# Altium PCB HCHO_Benchmark.PcbDoc
Units mm, origin at the board's own origin, x right, y up, seen from the top; angles counter-clockwise.
Board outline 75.3 x 69.27 mm, 2 copper layers (Top Layer, Bottom Layer); 48 components, 50 nets, 181 pads, 117 vias.
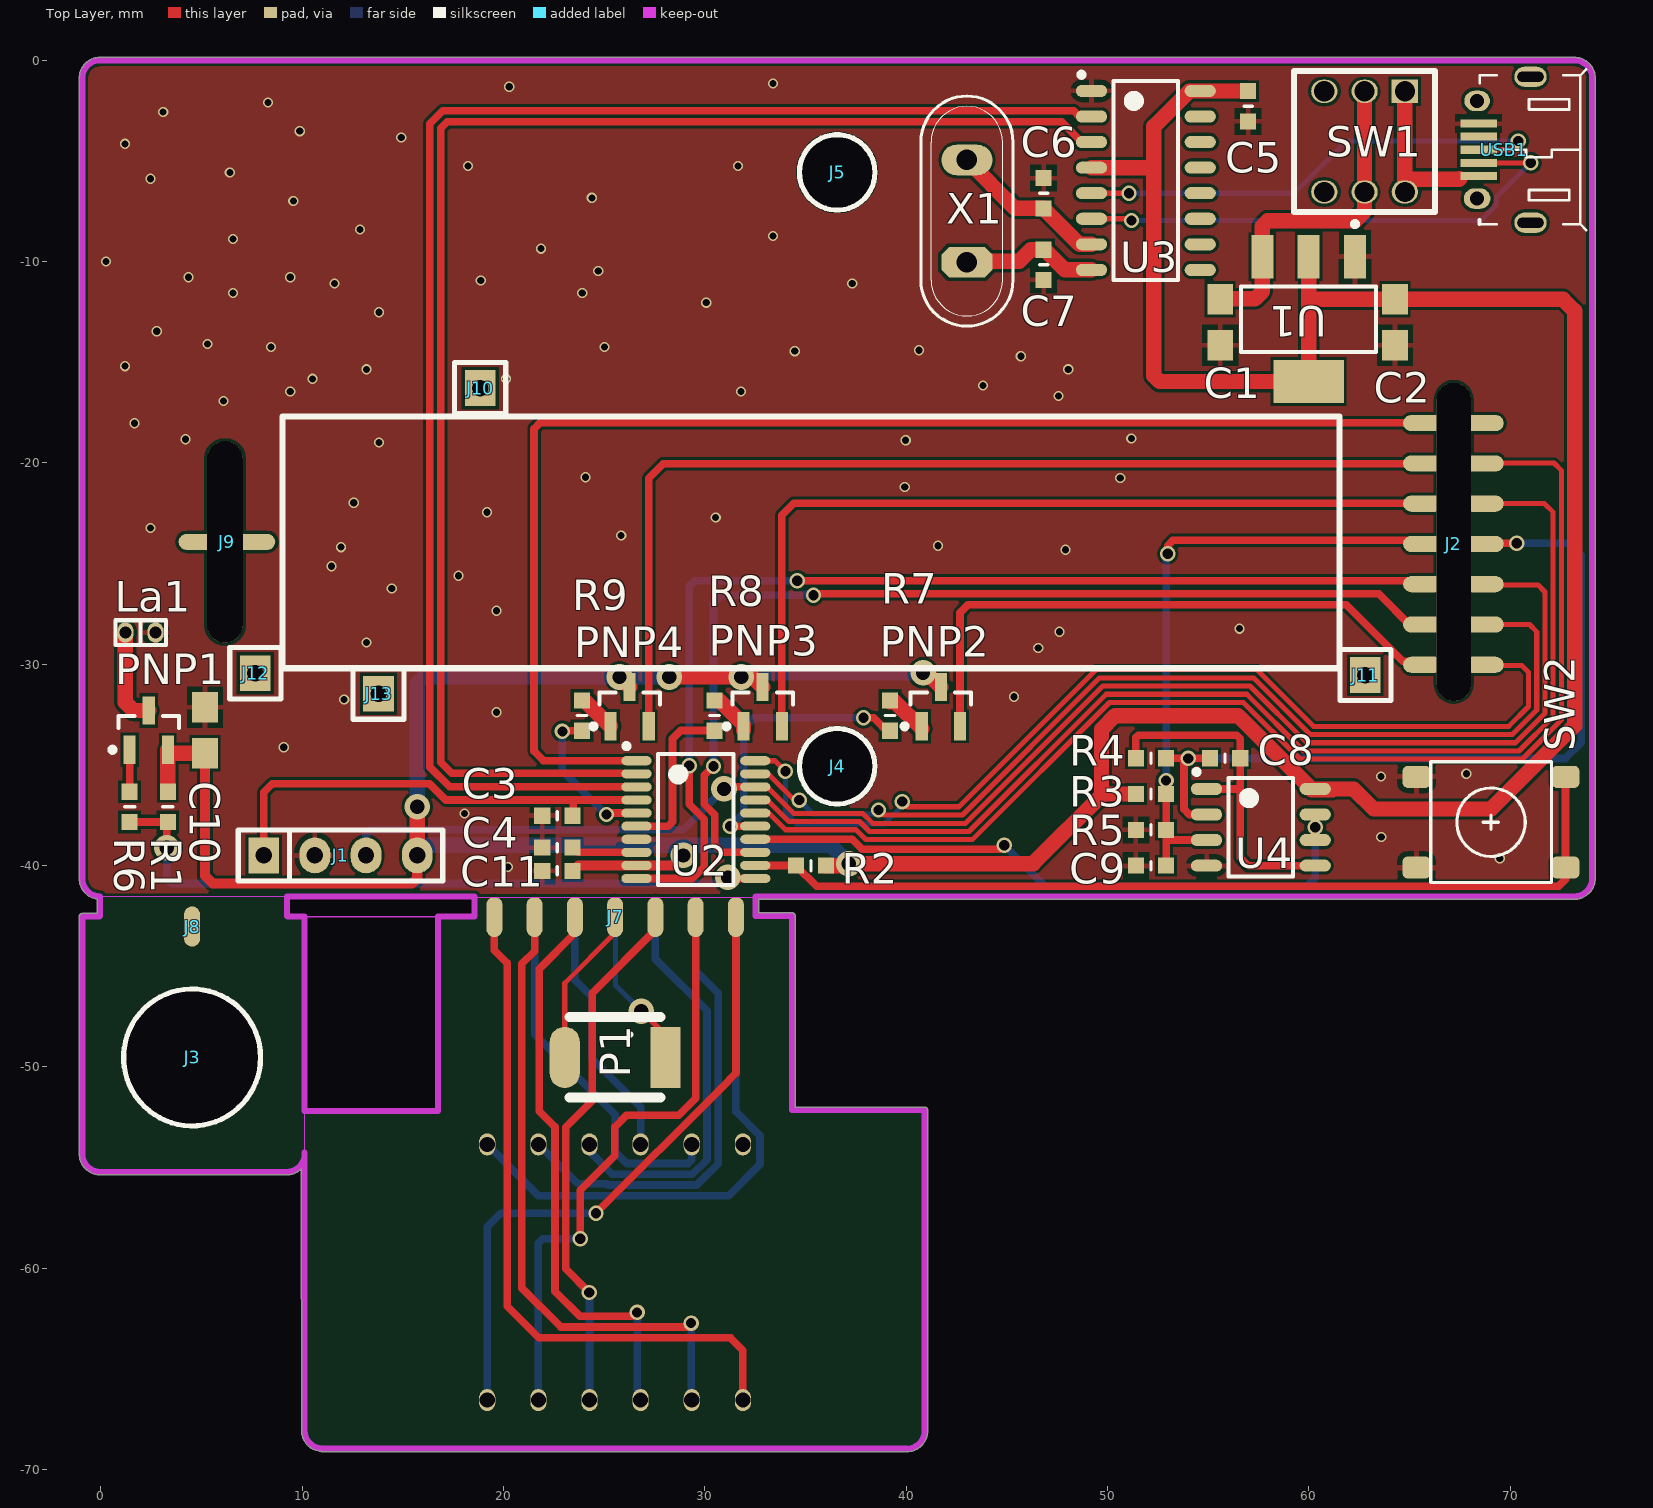
[diagram p0: Top Layer view]
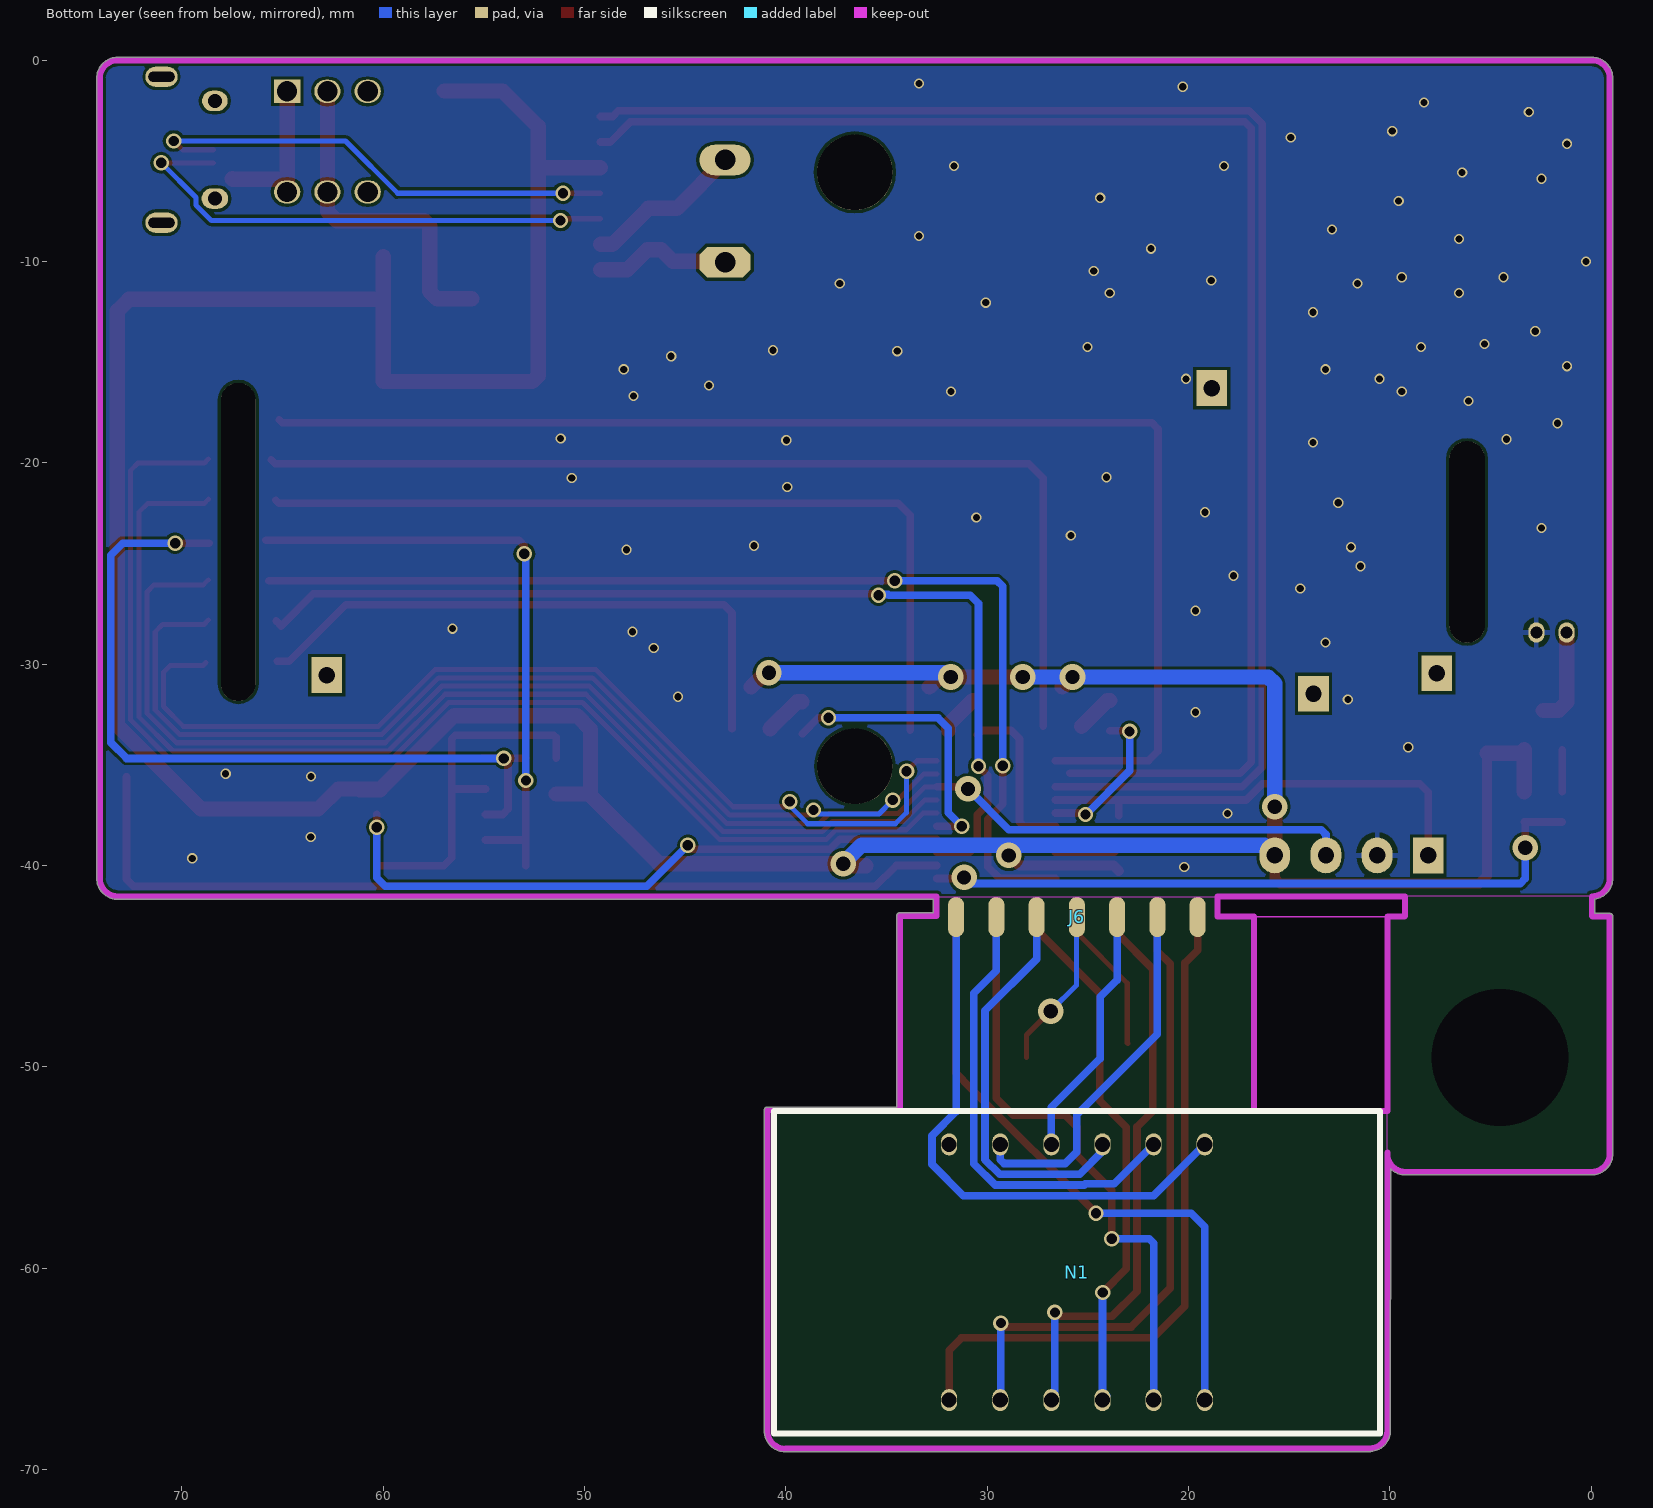
[diagram p1: Bottom Layer view, seen from below]

## Layer stack, top to bottom
Top Layer: signal copper 0.0356
Dielectric: dielectric 0.32, FR-4, Dk 4.8
Bottom Layer: signal copper 0.0356

## Board outline
-1.08,-54.322 -1.08,-42.532 cw(c-0.929,-42.532) -1.036,-42.425 cw(c-0.929,-42.531) -0.929,-42.381 -0.191,-42.381 -0.191,-41.668 cw(c-0.04,-40.64) -1.08,-40.64 -1.08,-0.929 cw(c-0.929,-0.929) -1.078,-0.909 cw(c-0.929,-0.889) -1.08,-0.889 cw(c-0.04,-0.889) -0.04,0.15 cw(c-0.04,0) -0.02,0.149 cw(c0,0) 0,0.15 73.182,0.15 cw(c73.182,-0.889) 74.221,-0.889 cw(c74.071,-0.889) 74.221,-0.89 74.221,-40.64 cw(c73.182,-40.64) 73.182,-41.679 32.671,-41.679 32.671,-42.343 34.337,-42.343 cw(c34.337,-42.494) 34.488,-42.494 34.488,-51.995 40.914,-51.995 cw(c40.914,-52.145) 41.064,-52.145 41.064,-68.16 cw(c40.914,-68.16) 41.054,-68.213 cw(c40.023,-68.081) 40.023,-69.12 cw(c40.023,-68.97) 39.982,-69.115 11.001,-69.115 cw(c11.001,-68.964) 10.94,-69.102 cw(c11.001,-68.064) 9.961,-68.064 9.958,-55.063 cw(c9.228,-54.323) 9.228,-55.362 cw(c9.228,-55.212) 9.211,-55.361 -0.04,-55.361 cw(c-0.04,-54.322)
cut-out: 18.551,-41.529 18.551,-42.532 9.23,-42.532 9.23,-41.529 9.231,-41.529
cut-out: 16.736,-42.531 16.736,-52.235 10.119,-52.235 10.119,-42.532 10.119,-42.531

## Design rules (kind name [scope] priority, off if disabled: settings)
Clearance "6mil Special" [(HasFootprint('FPC 0.5mm 4P') OR HasFootprint('FPC 0.5mm 16P') OR HasFootprint('QFN40P500X500X90_HS-41L'))] p1: gap=0.152
Clearance "8mil all" [All] p2: gap=0.152
ComponentClearance [All] p1: gap=-100 collisioncheckmode=3 verticalgap=0.254 showdistances=FALSE
Height [All] p1: minheight=0 maxheight=50.8 prefheight=12.7
HoleSize [All] p1: absolutevalues=TRUE maxlimit=1817.048 minlimit=0 maxpercent=80.000 minpercent=20.000
HoleToHoleClearance [All] p1: gap=0.203 allowstackedmicrovias=TRUE
MinimumSolderMaskSliver [All] p1: minsoldermaskwidth=0
PolygonConnect PolygonConnect_1 [isvia] p1: connectstyle=Direct reliefconductorwidth=0.254 reliefentries=4 polygonreliefangle="90 Angle" airgapwidth=0.254
PolygonConnect [All] p2: connectstyle=Relief reliefconductorwidth=0.254 reliefentries=4 polygonreliefangle="90 Angle" airgapwidth=0.254
RoutingCorners [All] p1: cornerstyle=45-Degree minsetback=0.254 maxsetback=2.54
RoutingVias [All] p1: holewidth=0.356 width=0.508 viastyle="Through Hole" minholewidth=0.356 minwidth=0.508 maxholewidth=2.54 maxwidth=5.08
SilkToSilkClearance [All] p1: silktosilkclearance=0
SilkToSolderMaskClearance [IsPad] p1: minsilkscreentomaskgap=0 clearancetoexposedcopper=TRUE
SolderMaskExpansion [All] p1: expansion=0.102
Width 20mil_Power [(InNet('EP_SUPPLY&VBAT') OR InNet('PSUPPLY') OR InNet('P_3.3V') OR InNet('PSUPPLYBAT') OR InNet('P_3.3V') OR InNet('P_5V'))] p1: maxlimit=1000 minlimit=0.203 preferedwidth=0.508
Width 8mil_Basic [All] p2: maxlimit=100 minlimit=0.203 preferedwidth=0.254
20 further rules are at their usual default settings.

## Classes and differential pairs
component class HCHO_Benchmark: C1 C2 C3 C4 C5 C7 C8 C9 C10 J1 J2 J4 J5 J6 J7 J8 J9 J10 J11 J12 J13 La1 N1 P1 PNP1 PNP2 PNP3 PNP4 R1 R2 R3 R4 R5 R6 R7 R8 R9 SW1 SW2 U1 U2 U3 U4 USB1 X1

## Components (designator, comment, footprint, x,y, rotation, side; value= is the part's Value field where it differs from the comment)
C1 "10uf" C0805 55.591,-13.019 r270 top
C2 "10uf" C0805 64.278,-13.019 r270 top
C3 "1uf" C0603 22.667,-37.526 r0 top
C4 "1uf" C0603 22.667,-39.11 r0 top
C5 "1uf" C0603 56.983,-2.286 r270 top
C6 "12pf" C0603 46.823,-6.604 r90 top
C7 "12pf" C0603 46.823,-10.16 r270 top
C8 "1uf" C0603 55.84,-34.671 r180 top
C9 "10uf" C0603 52.157,-40.005 r180 top
C10 "10uf" C0805 5.167,-33.274 r90 top
C11 "Comment" C0603 22.667,-40.268 r180 top
J1 "CON4" CON4 11.898,-39.497 r0 top
J2 "Con7x2_PCB" CON7X2_PCB 67.182,-23.927 r90 top
J3 "CON1" 6.6mm 4.525,-49.532 r0 top
J4 "CON1" 3.75mm 36.571,-35.07 r0 top
J5 "CON1" 3.75mm 36.571,-5.57 r0 top
J6 "CON7_PCB" CON7_PCB 25.54,-42.555 r0 bottom
J7 "CON7_PCB" CON7_PCB 25.539,-42.552 r180 top
J8 "CON1_PCB" CON1_PCB 4.128,-43.032 r0 top
J9 "CON1X2_PCB" CON1X2_PCB 6.159,-23.927 r90 top
J10 "CON1" CON1 18.838,-16.286 r0 top
J11 "CON1" CON1 62.807,-30.541 r0 top
J12 "CON1" CON1 7.666,-30.448 r0 top
J13 "CON1" CON1 13.788,-31.465 r0 top
La1 "Laser" Battry_Connector 1.212,-28.426 r0 top (schematic designator Laser1)
N1 "FJ4301BH" FJ4301BH 25.536,-60.201 r0 bottom
P1 "photodetector" BPW34 25.536,-49.532 r180 top
PNP1 "8550" SOT23-3 2.373,-33.274 r90 top
PNP2 "8550" SOT23-3 41.72,-32.109 r90 top
PNP3 "8550" SOT23-3 32.869,-32.109 r90 top
PNP4 "8550" SOT23-3 26.258,-32.109 r90 top
R1 "10K" R0603 3.323,-37.084 r90 top
R2 "10K" R0603 35.266,-40.005 r0 top
R3 "4K7" R0603 52.157,-36.449 r180 top
R4 "10M" R0603 52.157,-34.671 r180 top
R5 "1K" R0603 52.157,-38.227 r0 top
R6 "1K" R0603 1.423,-37.084 r270 top
R7 "1K" R0603 39.196,-32.553 r270 top
R8 "1K" R0603 30.478,-32.553 r270 top
R9 "1K" R0603 23.892,-32.553 r270 top
SW1 "SW_7x7mm" SW_7x7mm 62.765,-4.041 r180 top
SW2 "Patch_6x6x5" PATCH6X6X5 69.048,-37.846 r180 top
U1 "1117-3.3" SOT223 59.988,-12.86 r180 top
U2 "STM8S003F3P6" STM8S003F3P6 29.551,-37.719 r0 top
U3 "CH340G" SOP-16 51.903,-5.969 r0 top
U4 "LMV358" LMV358_SOP 57.618,-38.1 r0 top
USB1 "MicroUSB" MicroUSB 69.683,-4.445 r180 top
X1 "12MHZ" HC-49 43.013,-7.493 r90 top

## Footprints (in the part's own frame and the unit in brackets; to place one, negate y for a bottom-side part, rotate by r counter-clockwise, add the part's x,y. Pads: shape width x height; smd on the part's side, far side on the other; paste and mask are expansions set on the pad)
3.75mm [mm]
  round 3.75 hole 3.75 unplated: ""(0,0)
6.6mm [mm]
  round 6.6 hole 6.8 unplated: ""(0,0)
Battry_Connector [mm]
  oval 0.8x1 hole 0.6: 1(0,0) 2(1.5,0)
  silkscreen extent -0.5,-0.61 2.02,0.61
BPW34 [mm]
  rect 1.5x3.048 smd: A(-2.5,0)
  oval 1.5x3.048 smd: C(2.5,0)
  silkscreen extent -2.25,-2 2.25,2
C0603 [mm]
  rect 0.8x0.8 smd: 1(-0.75,0) 2(0.75,0)
  silkscreen extent 0,-0.2 0,0.2, body extent -0.8,-0.4 0.8,0.4, height 0.8
C0805 [mil]
  rect 60x50 smd: 1(-45,0) 2(45,0)
  body extent -52,-25 55,25, height 31
CON1 [mil]
  rect 60x70 hole 32: 1(0,0)
  silkscreen extent -50,-50 50,50, body extent -51,-50 52,50, height 295
CON1_PCB [mm]
  oval 0.8x2 smd: 1(0.397,0)
CON1X2_PCB [mm]
  oval 10x1.75 hole 1.75 slot 10 at 0 deg unplated: 0(0,0)
  oval 0.8x2 smd: 1(0,1.3) 2(0,-1.5)
CON4 [mil]
  rect 60x70 hole 32: 1(-150,0)
  oval 60x70 hole 32: 2(-50,0) 3(50,0) 4(150,0)
  silkscreen extent -200,-50 200,50, body extent -201,-50 199,50, height 295
CON7_PCB [mm]
  oval 0.8x2 smd: 1(-6,0) 2(-4,0) 3(-2,0) 4(0,0) 5(2,0) 6(4,0) 7(6,0)
CON7X2_PCB [mm]
  oval 0.8x2 smd: 1(-6.1,1.5) 2(-4.1,1.5) 3(-2.1,1.5) 4(-0.1,1.5) 5(1.9,1.5) 6(3.9,1.5) 7(5.9,1.5) 8(5.9,-1.5) 9(3.9,-1.5) 10(1.9,-1.5) 11(-0.1,-1.5) 12(-2.1,-1.5) 13(-4.1,-1.5) 14(-6.1,-1.5)
  oval 15.8x1.7 hole 1.7 slot 15.8 at 0 deg unplated: ""(0.003,-0.012)
FJ4301BH [mm]
  oval 0.8x1.1 hole 0.75: 1(-6.35,-6.35) 2(-3.81,-6.35) 3(-1.27,-6.35) 4(1.27,-6.35) 5(3.81,-6.35) 6(6.35,-6.35) 7(6.35,6.35) 8(3.81,6.35) 9(1.27,6.35) 10(-1.27,6.35) 11(-3.81,6.35) 12(-6.35,6.35)
  silkscreen extent -15.05,-8 15.05,8, body extent -15.05,-8 15.05,8, height 15.1
HC-49 [mil]
  oct 60x100 hole 40: 1(-100,0)
  oval 60x100 hole 40: 2(100,0)
  silkscreen extent -225,-90 225,90, body extent -224,-91 226,89, height 134
LMV358_SOP [mm] "TSOP, 8-Leads, Body 3.00x3.00mm, Pitch 0.65mm, IPC Medium Density"
  oval 1.55x0.6 smd: 1(-2.7,1.905) 2(-2.7,0.635) 3(-2.7,-0.635) 4(-2.7,-1.905) 5(2.7,-1.905) 6(2.7,-0.635) 7(2.7,0.635) 8(2.7,1.905)
  silkscreen extent -3.32,-2.45 1.6,2.87, body extent -1.95,-2.47 1.93,2.46, height 1.1
MicroUSB [mm]
  oval 1.6x1 hole 0.5 slot 1.3 at 0 deg unplated: 0(-1.325,3.625) 0(-1.325,-3.625)
  rect 1.8x0.4 smd: 1(1.25,1.3) 2(1.25,0.65) 3(1.25,0) 4(1.25,-0.65) 5(1.25,-1.3)
  oval 1.321x1.016 hole 0.7 unplated: ""(1.325,2.425)
  oval 1.27x1.016 hole 0.7 unplated: ""(1.325,-2.425)
  silkscreen extent -4.1,-4 1.2,4, body extent -3.62,-3.96 1.81,4.02, height 2.99
PATCH6X6X5 [mm]
  rrect50% 1.4x1.1 smd: 1(-3.7,2.25) 2(-3.7,-2.25) 3(3.7,-2.25) 4(3.7,2.25)
  silkscreen extent -3,-3 3,3, body extent -4.13,-3 4.13,3, height 5
R0603 [mm]
  rect 0.8x0.8 smd: 1(-0.75,0) 2(0.75,0)
  silkscreen extent 0,-0.25 0,0.25, body extent -0.8,-0.4 0.8,0.4, height 0.5
SOP-16 [mm]
  oval 1.55x0.6 smd: 1(-2.7,4.445) 2(-2.7,3.175) 3(-2.7,1.905) 4(-2.7,0.635) 5(-2.7,-0.635) 6(-2.7,-1.905) 7(-2.7,-3.175) 8(-2.7,-4.445) 9(2.7,-4.445) 10(2.7,-3.175) 11(2.7,-1.905) 12(2.7,-0.635) 13(2.7,0.635) 14(2.7,1.905) 15(2.7,3.175) 16(2.7,4.445)
  silkscreen extent -3.32,-4.95 1.6,5.37, body extent -1.91,-4.95 1.91,4.95, height 1
SOT23-3 [mm]
  rect 1.4x0.6 smd: 1(-0.975,0.95) 2(-0.975,-0.95) 3(0.975,0)
  silkscreen extent -1.1,-1.5 0.7,1.92, body extent -0.7,-1.5 0.7,1.5, height 1
SOT223 [mm]
  rect 1.1x2.15 smd: 1(-2.3,-3.1) 2(0,-3.1) 3(2.3,-3.1)
  rect 3.5x2.15 smd: 4(0,3.1)
  silkscreen extent -3.35,-4.85 3.35,1.63, body extent -3.3,-3.2 3.3,3.1, height 1.7
STM8S003F3P6 [mm]
  oval 1.5x0.45 smd: 1(-2.95,2.925) 2(-2.95,2.275) 3(-2.95,1.625) 4(-2.95,0.975) 5(-2.95,0.325) 6(-2.95,-0.325) 7(-2.95,-0.975) 8(-2.95,-1.625) 9(-2.95,-2.275) 10(-2.95,-2.925) 11(2.95,-2.925) 12(2.95,-2.275) 13(2.95,-1.625) 14(2.95,-0.975) 15(2.95,-0.325) 16(2.95,0.325) 17(2.95,0.975) 18(2.95,1.625) 19(2.95,2.275) 20(2.95,2.925)
  silkscreen extent -3.57,-3.25 1.88,3.77, body extent -2.22,-3.25 2.2,3.24, height 1.2
SW_7x7mm [mm]
  rect 1.3x1.15 hole 1: 1(-2,-2.5)
  oval 1.3x1.15 hole 1: 2(0,-2.5) 3(2,-2.5) 4(2,2.5) 5(0,2.5) 6(-2,2.5)
  silkscreen extent -3.5,-3.5 3.5,3.5, body extent -3.54,-3.49 3.51,3.52, height 12.5

## Part data
C1 C2 C3 C4 C5 C6 C7 C8 C9 C10: library part C
PNP1 PNP2 PNP3 PNP4: library part PNP
R1 R2 R3 R4 R5 R6 R7 R8 R9: library part R
U1: library part 1117
X1: library part CRYSTAL

## Via types
v1: diameter 0.508, hole 0.356, Top Layer to Bottom Layer, 79 vias
v2: diameter 0.762, hole 0.508, Top Layer to Bottom Layer, 27 vias
v3: diameter 1.27, hole 0.711, Top Layer to Bottom Layer, 11 vias

## Nets (pads, with @x,y where several pads share a name; then routed paths per layer and width w, separated by ;. In a path a pad name is that pad's centre, name@x,y a point inside that pad or via, vN(x,y) a via of type N, cw(c..) or ccw(c..) an arc to the next point about the centre after c; other vN are vias at no path point)
-INA: C8.2 J2.11 R4.1 U4.2 | length 40.4
  Top Layer w0.381: R4.1 v2@53.808,-34.671 ; v2(54.003,-34.679) v2@53.8,-34.679 ; U4.2 54.062,-37.465 53.8,-37.203 v2@53.8,-34.679 ; C8.2 v2@53.808,-34.671 ; J2.11@68.652,-23.988 v2(70.329,-23.988) ; v2@53.8,-34.679 v2@53.808,-34.671
  Bottom Layer w0.381: v2(54.003,-34.679) 72.743,-34.679 73.534,-33.888 73.534,-24.585 72.937,-23.988 v2(70.329,-23.988)
C_LASER: R1.1 R6.2 U2.11 | length 34.2
  Top Layer w0.381: R6.2 R1.1 3.262,-37.895 v3(3.262,-39.116) ; v3(31.141,-40.592) 31.194,-40.644 U2.11
  Bottom Layer w0.381: v3(3.262,-39.116) 3.262,-40.64 3.516,-40.894 30.839,-40.894 v3(31.141,-40.592)
GND: C1.2 C2.2 C3.1 C4.1 C5.2 C6.2 C7.2 C9.2 C10.2 C11.2 J1.2 La1.2 R5.1 SW2.3 SW2.4 U1.1 U2.7 U3.1 U4.4 USB1.5
  other v1: 20.204,-40.079 69.476,-39.642 63.596,-38.587 18.064,-37.415 63.586,-35.572 67.82,-35.443 9.083,-34.123 19.651,-32.388 12.08,-31.757 45.346,-31.616 46.56,-29.188 13.184,-28.918 47.613,-28.384 56.559,-28.233 19.651,-27.341 14.445,-26.237 17.758,-25.605 11.449,-25.132 47.915,-24.313 11.922,-24.186 41.582,-24.112 25.838,-23.602 2.458,-23.239 30.533,-22.712 19.178,-22.451 12.553,-21.977 39.923,-21.197 50.628,-20.744 24.068,-20.716 13.815,-18.98 39.97,-18.876 4.193,-18.823 51.182,-18.784 1.669,-18.034 6.086,-16.93 47.568,-16.675 9.398,-16.457 31.797,-16.456 43.815,-16.159 10.502,-15.826 20.124,-15.826 13.184,-15.352 48.044,-15.352 1.195,-15.195 45.691,-14.705 34.459,-14.449 40.63,-14.406 8.452,-14.248 25.014,-14.248 5.297,-14.091 2.773,-13.46 13.815,-12.513 30.062,-12.04 6.559,-11.567 23.91,-11.567 11.606,-11.094 37.318,-11.094 18.862,-10.936 4.35,-10.778 9.398,-10.778 24.699,-10.463 0.249,-9.989 21.859,-9.358 6.559,-8.885 33.374,-8.727 12.868,-8.412 9.556,-6.992 24.383,-6.835 2.458,-5.888 6.401,-5.573 18.231,-5.257 31.639,-5.257 1.195,-4.153 14.919,-3.838 9.871,-3.522 3.088,-2.576 8.294,-2.102 20.282,-1.314 33.374,-1.156
HCHO_ADC: U2.14 U4.6 U4.7 | length 32.9
  Top Layer w0.381: U2.14 37.314,-38.694 37.805,-39.185 44.673,-39.185 v2(44.863,-38.995) ; U4.6 v2(60.318,-38.1) U4.7
  Bottom Layer w0.381: v2(44.863,-38.995) 46.905,-41.036 59.889,-41.036 60.318,-40.607 v2(60.318,-38.1)
N_A: J2.2 U2.13 | length 50.6
  Top Layer w0.381: v2@30.427,-35.14 v2(30.427,-35.063) 29.97,-35.521 29.97,-36.953 30.492,-37.476 30.492,-38.98 30.857,-39.344 U2.13 ; v2(35.394,-26.573) 35.461,-26.506 63.463,-26.506 65.059,-28.102 J2.2@65.312,-27.849
  Bottom Layer w0.381: v2@30.466,-35.024 v2(30.427,-35.063) 30.427,-26.982 30.836,-26.573 34.888,-26.573 34.922,-26.54 35.361,-26.54 v2(35.394,-26.573)
N_B: J2.7 U2.1 | length 65.1
  Top Layer w0.381: U2.1 21.984,-34.794 21.513,-34.323 21.513,-18.296 21.807,-18.002 65.003,-18.002 J2.7@65.156,-17.849
N_C: J2.10 U2.17 | length 58.8
  Top Layer w0.254: U2.17 33.093,-36.744 34.166,-37.818 37.677,-37.818 38.168,-38.309 43.113,-38.309 49.932,-31.49 56.911,-31.49 59.726,-34.305 70.435,-34.305 72.133,-32.607 72.133,-22.453 71.691,-22.012 68.886,-22.012 J2.10@68.682,-21.808
N_COM1: R7.2 U2.15 | length 14.2
  Top Layer w0.381: v2(31.259,-38.044) U2.15 ; v2(37.878,-32.664) 38.375,-32.664 R7.2@39.166,-33.455
  Bottom Layer w0.381: v2(31.259,-38.044) 31.925,-37.378 31.925,-33.18 32.441,-32.664 v2(37.878,-32.664)
N_COM2: R8.2 U2.6 | length 8.3
  Top Layer w0.381: U2.6 28.169,-38.044 28.388,-37.825 28.388,-33.704 28.799,-33.292 30.266,-33.292 R8.2@30.478,-33.504
N_COM3: R9.2 U2.5 | length 7.6
  Top Layer w0.381: v2(22.919,-33.336) 22.952,-33.303 R9.2 ; v2(25.108,-37.468) 25.182,-37.394 U2.5
  Bottom Layer w0.381: v2(22.919,-33.336) 22.919,-35.279 v2(25.108,-37.468) v2@25.108,-37.42
N_D: J2.13 U2.19 | length 51.2
  Top Layer w0.254: U2.19 33.138,-35.444 34.553,-36.859 34.573,-36.859 v2(34.681,-36.751) ; v2(38.62,-37.242) 38.874,-37.496 39.653,-37.496 39.666,-37.484 42.789,-37.484 49.595,-30.677 57.247,-30.677 60.062,-33.492 70.099,-33.492 71.32,-32.271 71.32,-28.391 70.951,-28.022 68.896,-28.022 J2.13@68.682,-27.808
  Bottom Layer w0.254: v2(34.681,-36.751) 35.367,-37.437 38.426,-37.437 v2(38.62,-37.242)
N_DP: J1.3 J2.12 U2.18 | length 75.2
  Top Layer w0.254: U2.18 33.09,-36.094 34.407,-37.411 37.845,-37.411 38.336,-37.903 42.945,-37.903 49.764,-31.084 57.079,-31.084 59.894,-33.898 70.267,-33.898 71.726,-32.439 71.726,-26.407 71.376,-26.057 68.93,-26.057 J2.12@68.682,-25.808
  Top Layer w0.381: v3(30.948,-36.195) 31.049,-36.094 U2.18
  Bottom Layer w0.381: J1.3 13.168,-38.457 13.399,-38.226 28.917,-38.226 v3(30.948,-36.195)
N_E: J2.14 U2.20 | length 50
  Top Layer w0.254: U2.20 33.48,-34.794 v2(33.997,-35.311) ; v2(39.8,-36.823) 40.054,-37.077 42.62,-37.077 49.427,-30.271 57.416,-30.271 60.231,-33.086 69.93,-33.086 70.914,-32.102 70.914,-30.394 70.591,-30.072 68.946,-30.072 J2.14@68.794,-29.92
  Bottom Layer w0.254: v2(33.997,-35.311) 34.009,-35.323 34.009,-37.375 34.559,-37.926 38.905,-37.926 39.8,-37.031 v2(39.8,-36.823)
N_F: J2.3 U2.10 | length 54.4
  Top Layer w0.381: U2.10 29.375,-40.644 29.959,-40.06 29.959,-37.697 29.226,-36.963 v2(29.226,-35.043) ; v2(34.588,-25.849) J2.3@65.67,-25.849
  Bottom Layer w0.381: v2(29.226,-35.043) 29.226,-26.131 29.508,-25.849 v2(34.588,-25.849)
N_G: J2.9 U2.16 | length 61.9
  Top Layer w0.254: U2.16 33.168,-37.394 33.998,-38.224 37.508,-38.224 38,-38.715 43.281,-38.715 50.1,-31.897 56.742,-31.897 59.557,-34.711 70.604,-34.711 72.539,-32.776 72.539,-20.37 72.171,-20.002 68.876,-20.002 J2.9@68.682,-19.808
NetC1_1: C1.1 SW1.2 SW1.5 U1.3 | length 16.8
  Top Layer w0.762: C1.1@55.591,-11.85 57.316,-11.85 57.688,-11.478 U1.3 57.688,-8.241 57.964,-7.965 62.313,-7.965 62.765,-7.513 SW1.5 SW1.2
NetC4_2: C4.2 U2.8 | length 3.2
  Top Layer w0.381: C4.2@23.457,-39.11 23.691,-39.344 U2.8
NetC6_1: C6.1 U3.7 X1.2 | length 7.9
  Top Layer w0.762: X1.2 45.414,-7.354 C6.1 48.613,-9.144 U3.7
NetC7_1: C7.1 U3.8 X1.1 | length 6.9
  Top Layer w0.762: X1.1 43.069,-9.977 45.621,-9.977 46.188,-9.41 C7.1 46.877,-9.41 47.881,-10.414 U3.8
NetJ2_1: J2.1 PNP2.2 | length 29.7
  Top Layer w0.381: PNP2.2@42.67,-33.203 42.67,-27.436 43.067,-27.039 61.848,-27.039 64.658,-29.849 J2.1@65.245,-29.849
NetJ2_5: J2.5 PNP3.2 | length 42.5
  Top Layer w0.381: PNP3.2@33.819,-33.276 33.819,-22.602 34.419,-22.002 65.182,-22.002 J2.5@65.334,-21.849
NetJ2_6: J2.6 PNP4.2 | length 51.1
  Top Layer w0.381: PNP4.2 27.208,-20.761 27.928,-20.042 65.365,-20.042 J2.6@65.558,-19.849
NetJ6_2: J6.2 N1.5 | length 18.2
  Bottom Layer w0.381: J6.2 21.54,-48.369 25.548,-52.377 25.548,-54.229 26.118,-54.8 29.157,-54.8 29.346,-54.611 N1.5
NetJ6_3: J6.3 N1.4 | length 12.6
  Bottom Layer w0.381: J6.3 23.54,-45.683 24.378,-46.522 24.378,-49.58 26.806,-52.008 N1.4
NetJ6_4: J6.4 P1.A | length 7.5
  Top Layer w0.254: v3(26.844,-47.23) 28.036,-48.421 P1.A
  Bottom Layer w0.254: J6.4@25.536,-43.056 25.56,-43.08 25.56,-45.945 v3(26.844,-47.23)
NetJ6_5: J6.5 N1.3 | length 20.1
  Bottom Layer w0.381: N1.3 24.266,-54.2 25.398,-55.333 29.378,-55.333 30.106,-54.605 30.106,-47.208 27.54,-44.642 J6.5
NetJ6_6: J6.6 N1.2 | length 22.9
  Bottom Layer w0.381: N1.2 23.685,-55.81 25.122,-55.81 25.178,-55.866 29.599,-55.866 30.658,-54.807 30.658,-46.351 29.54,-45.233 J6.6
NetJ6_7: J6.7 N1.1 | length 27.9
  Bottom Layer w0.381: N1.1 21.734,-56.4 31.173,-56.4 32.736,-54.836 32.736,-53.427 31.523,-52.213 J6.7@31.523,-42.726
NetJ7_1: J7.1 N1.12 | length 31.9
  Top Layer w0.381: v2(24.587,-57.271) 30.802,-51.055 31.539,-50.318 J7.1
  Bottom Layer w0.381: N1.12 19.186,-57.945 19.86,-57.271 v2(24.587,-57.271)
NetJ7_2: J7.2 N1.11 | length 29.8
  Top Layer w0.381: v2(23.806,-58.542) 23.806,-56.129 25.513,-54.422 25.513,-52.989 26.103,-52.399 28.704,-52.399 29.539,-51.564 J7.2
  Bottom Layer w0.381: N1.11 21.726,-58.767 21.951,-58.542 v2(23.806,-58.542)
NetJ7_3: J7.3 N1.10 | length 26.6
  Top Layer w0.381: v2(24.259,-61.206) 23.083,-60.03 23.083,-53.009 24.401,-51.691 24.401,-46.341 27.539,-43.202 J7.3
  Bottom Layer w0.381: N1.10@24.058,-66.344 N1.10 24.266,-61.213 v2(24.259,-61.206)
NetJ7_4: J7.4 P1.C | length 6.8
  Top Layer w0.254: P1.C@23.006,-48.849 23.036,-48.82 23.036,-45.843 25.535,-43.343 J7.4@25.535,-43.057
NetJ7_5: J7.5 N1.9 | length 28.8
  Top Layer w0.381: J7.5 23.539,-43.369 21.768,-45.14 21.768,-52.199 22.549,-52.98 22.549,-61.141 23.794,-62.386 26.44,-62.386 v2(26.63,-62.195)
  Bottom Layer w0.381: v2(26.63,-62.195) 26.63,-66.376 N1.9
NetJ7_6: J7.6 N1.8 | length 31.6
  Top Layer w0.381: J7.6 21.539,-44.253 20.904,-44.889 20.904,-60.985 22.838,-62.919 v2@29.197,-62.919
  Bottom Layer w0.381: v2(29.314,-62.729) 29.314,-66.519 N1.8
NetJ7_7: J7.7 N1.7 | length 34.7
  Top Layer w0.381: J7.7 19.539,-44.208 20.176,-44.845 20.176,-61.89 21.739,-63.452 31.266,-63.452 31.886,-64.072 N1.7
NetLA1_1: La1.1 PNP1.3 | length 4.8
  Top Layer w0.762: La1.1 1.212,-31.9 1.612,-32.299 PNP1.3
NetPNP1_1: PNP1.1 R6.1 | length 2.1
  Top Layer w0.381: R6.1 PNP1.1
NetPNP2_1: PNP2.1 R7.1 | length 2.1
  Top Layer w0.762: R7.1@39.196,-31.857 39.425,-31.857 PNP2.1@40.77,-33.203
NetPNP3_1: PNP3.1 R8.1 | length 2
  Top Layer w0.762: R8.1@30.679,-31.803 30.718,-31.803 31.919,-33.004 PNP3.1@31.919,-33.276
NetPNP4_1: PNP4.1 R9.1 | length 1.9
  Top Layer w0.762: R9.1 24.027,-31.803 PNP4.1
NetSW1_1: SW1.1 SW1.6 USB1.1 | length 7.7
  Top Layer w0.762: SW1.6 64.765,-5.915 ; SW1.1 64.765,-5.915 ; 67.489,-5.892 67.466,-5.915 64.765,-5.915
NRESET: C3.2 J1.1 U2.4 | length 22.9
  Top Layer w0.381: J1.1 8.088,-36.358 8.506,-35.94 16.317,-35.94 17.121,-36.744 U2.4 ; C3.2@23.455,-37.526 23.455,-36.77
OUT1: C8.1 R4.2 U4.1 U4.5 | length 17.8
  Top Layer w0.381: R4.2 51.407,-33.643 51.522,-33.528 56.416,-33.528 56.59,-33.701 C8.1 56.59,-36.195 ; U4.1 56.59,-36.195 ; U4.5 56.983,-40.005 56.59,-39.612 56.59,-36.195
P_3.3V: C2.1 C5.1 C10.1 C11.1 J1.4 PNP1.2 PNP2.3 PNP3.3 PNP4.3 R1.2 R2.2 R3.2 U1.2 U1.4 U2.9 U3.4 U3.16 U4.8 | length 207.5
  Top Layer w0.508: C10.1 5.167,-40.513 5.548,-40.894 15.454,-40.894 15.708,-40.64 J1.4 ; C11.1@23.457,-40.268 23.731,-39.994 U2.9 28.419,-39.994 v3(28.916,-39.497) v3@28.916,-39.878
  Top Layer w0.762: R1.2 PNP1.2 3.491,-34.417 C10.1 ; J1.4 v3(15.708,-37.073) ; v3(25.758,-30.633) PNP4.3 ; v3(28.231,-30.633) v3(31.809,-30.633) ; v3@31.835,-30.633 v3(31.809,-30.633) ; PNP3.3 32.368,-30.633 v3(31.809,-30.633) ; R2.2 37.05,-40.005 v3(37.146,-39.909) 46.307,-39.909 49.767,-36.449 ; v3(40.835,-30.43) 41.017,-30.43 PNP2.3 ; U3.4 52.275,-5.334 52.299,-5.359 ; R3.2 49.699,-36.449 49.699,-33.232 50.374,-32.557 56.469,-32.557 60.144,-36.232 61.174,-36.232 ; C5.1@56.971,-1.524 U3.16 54.062,-1.524 52.299,-3.286 52.299,-5.359 ; U4.8 62.224,-36.195 63.221,-37.192 69.057,-37.192 73.2,-33.049 73.2,-12.449 72.626,-11.876 C2.1 59.988,-11.876 U1.2 U1.4 52.582,-15.96 52.299,-15.677 52.299,-5.359
  Bottom Layer w0.762: J1.4 16.216,-38.989 29.424,-38.989 ; v3(15.708,-37.073) 15.708,-30.96 16.034,-30.633 v3(25.758,-30.633) v3(28.231,-30.633) ; v3(28.916,-39.497) 29.424,-38.989 ; v3(31.809,-30.633) 32.012,-30.43 v3(40.835,-30.43) ; v3(37.146,-39.909) 36.226,-38.989 29.424,-38.989
S_UD+: U3.5 USB1.3 | length 24.4
  Top Layer w0.254: U3.5 v2(51.061,-6.604) ; USB1.3 69.965,-4.445 v2(70.397,-4.013)
  Bottom Layer w0.254: v2(51.061,-6.604) 59.275,-6.604 61.866,-4.013 v2(70.397,-4.013)
S_UD-: U3.6 USB1.2 | length 25.9
  Top Layer w0.254: U3.6 51.098,-7.874 v2(51.185,-7.961) ; USB1.2 v2(71.021,-5.095)
  Bottom Layer w0.254: v2(51.185,-7.961) 68.533,-7.961 69.297,-7.196 69.297,-6.819 v2(71.021,-5.095)
TRRIGLE: R2.1 SW2.1 SW2.2 U2.12 | length 45.9
  Top Layer w0.381: U2.12 34.505,-39.994 R2.1 35.547,-41.036 72.397,-41.036 72.748,-40.685 SW2.1 SW2.2
UART_RXD: U2.3 U3.2 | length 75.9
  Top Layer w0.381: U2.3 17.328,-36.094 16.339,-35.105 16.339,-3.152 16.977,-2.515 48.321,-2.515 48.601,-2.794 U3.2
UART_TXD: U2.2 U3.3 | length 73.6
  Top Layer w0.381: U2.2@25.899,-35.422 17.43,-35.422 16.88,-34.873 16.872,-34.873 16.872,-3.373 17.198,-3.048 47.712,-3.048 48.728,-4.064 U3.3
V0.58: C9.1 J2.4 R3.1 R5.2 U4.3 | length 30.9
  Top Layer w0.381: C9.1 52.907,-38.735 ; v2(52.907,-35.778) R3.1 R5.2 52.907,-38.735 ; v2(52.983,-24.516) 52.983,-24.115 53.249,-23.849 J2.4@65.826,-23.849 ; U4.3 52.907,-38.735
  Bottom Layer w0.381: v2(52.907,-35.778) 52.907,-24.593 v2(52.983,-24.516)
pads on no net: J2. J2.8 J3. J4. J5. J6.1 J8.1 J9.0 J9.1 J9.2 J10.1 J11.1 J12.1 J13.1 N1.6 SW1.3 SW1.4 U3.9 U3.10 U3.11 U3.12 U3.13 U3.14 U3.15 USB1. USB1.0 USB1.4

## Polygon pours and split planes (outlines as drawn)
GND on Top Layer "Bottom Layer-No Net" (solid, remove dead copper, pour order 2): -4.217,3.433 78.554,3.433 78.726,3.607 78.726,-43.27 78.899,-43.444 -3.871,-43.444 -4.217,-43.097
GND on Bottom Layer "Bottom Layer-No Net" (solid, remove dead copper, pour order 4): -4.229,4.675 -4.076,4.828 74.929,4.828 74.929,-42.399 75.209,-42.678 74.929,-42.957 -4.713,-42.957

## Keep-outs
Keep-Out Layer:
  lines w0.01: -0.04,-41.529 10.385,-41.529 ; 10.112,-54.253 10.112,-52.196 ; 18.553,-41.567 32.532,-41.567
  lines w0.3: -0.929,-42.532 -0.929,-54.322 ccw(c-0.04,-54.322) -0.04,-55.211 9.22,-55.211 ; -0.929,-42.531 -0.073,-42.531 -0.04,-42.499 -0.04,-41.529 cw(c-0.04,-40.64) -0.929,-40.64 -0.929,-0.929 ; -0.929,-0.889 cw(c-0.04,-0.889) -0.04,0 ; 0,0 73.182,0 cw(c73.182,-0.889) 74.071,-0.889 74.071,-40.64 cw(c73.182,-40.64) 73.182,-41.529 32.521,-41.529 32.521,-42.494 ; 9.228,-55.212 ccw(c9.228,-54.323) 10.117,-54.323 ; 9.231,-42.499 9.231,-41.529 18.551,-41.529 ; 9.263,-42.531 10.119,-42.531 10.119,-52.196 16.736,-52.196 16.736,-42.532 18.551,-42.532 18.551,-41.567 ; 10.108,-54.253 10.112,-68.064 ccw(c11.001,-68.064) 11.001,-68.953 ; 11.001,-68.964 40.023,-68.964 ; 32.523,-42.494 34.337,-42.494 34.337,-52.145 40.914,-52.145 40.914,-68.16 ; 40.023,-68.97 ccw(c40.023,-68.081) 40.912,-68.081

## Other copper
Top Layer:
  rectangle net NetSW1_1: 67.312,-5.962 67.658,-5.522

## Silkscreen, mask and mechanical layers (free items; w line width, h text height)
Top Overlay:
  circle w0.254: c36.571,-35.07 r1.875
  circle w0.254: c36.571,-5.57 r1.875
  circle w0.254: c4.525,-49.532 r3.4
  lines w0.3: 26.267,-48.421 26.298,-48.39 ; 9.011,-30.2 61.511,-30.2 61.511,-17.7 9.011,-17.7 9.011,-30.2

## Text inside footprints (layer, text, board x,y; h text height)
U3: Mechanical 15 "1" at 52.352,-6.133 h0.75 r90
U4: Mechanical 15 "1" at 58.067,-38.264 h0.75 r90